# Altium PCB PCB_test_2026-06-06.pcbdoc
Units mm, origin at the board's own origin, x right, y up, seen from the top; angles counter-clockwise.
Board outline 102.65 x 77.65 mm, 2 copper layers (Top Layer, Bottom Layer); 1 components, 36 nets, 36 pads, 0 vias.
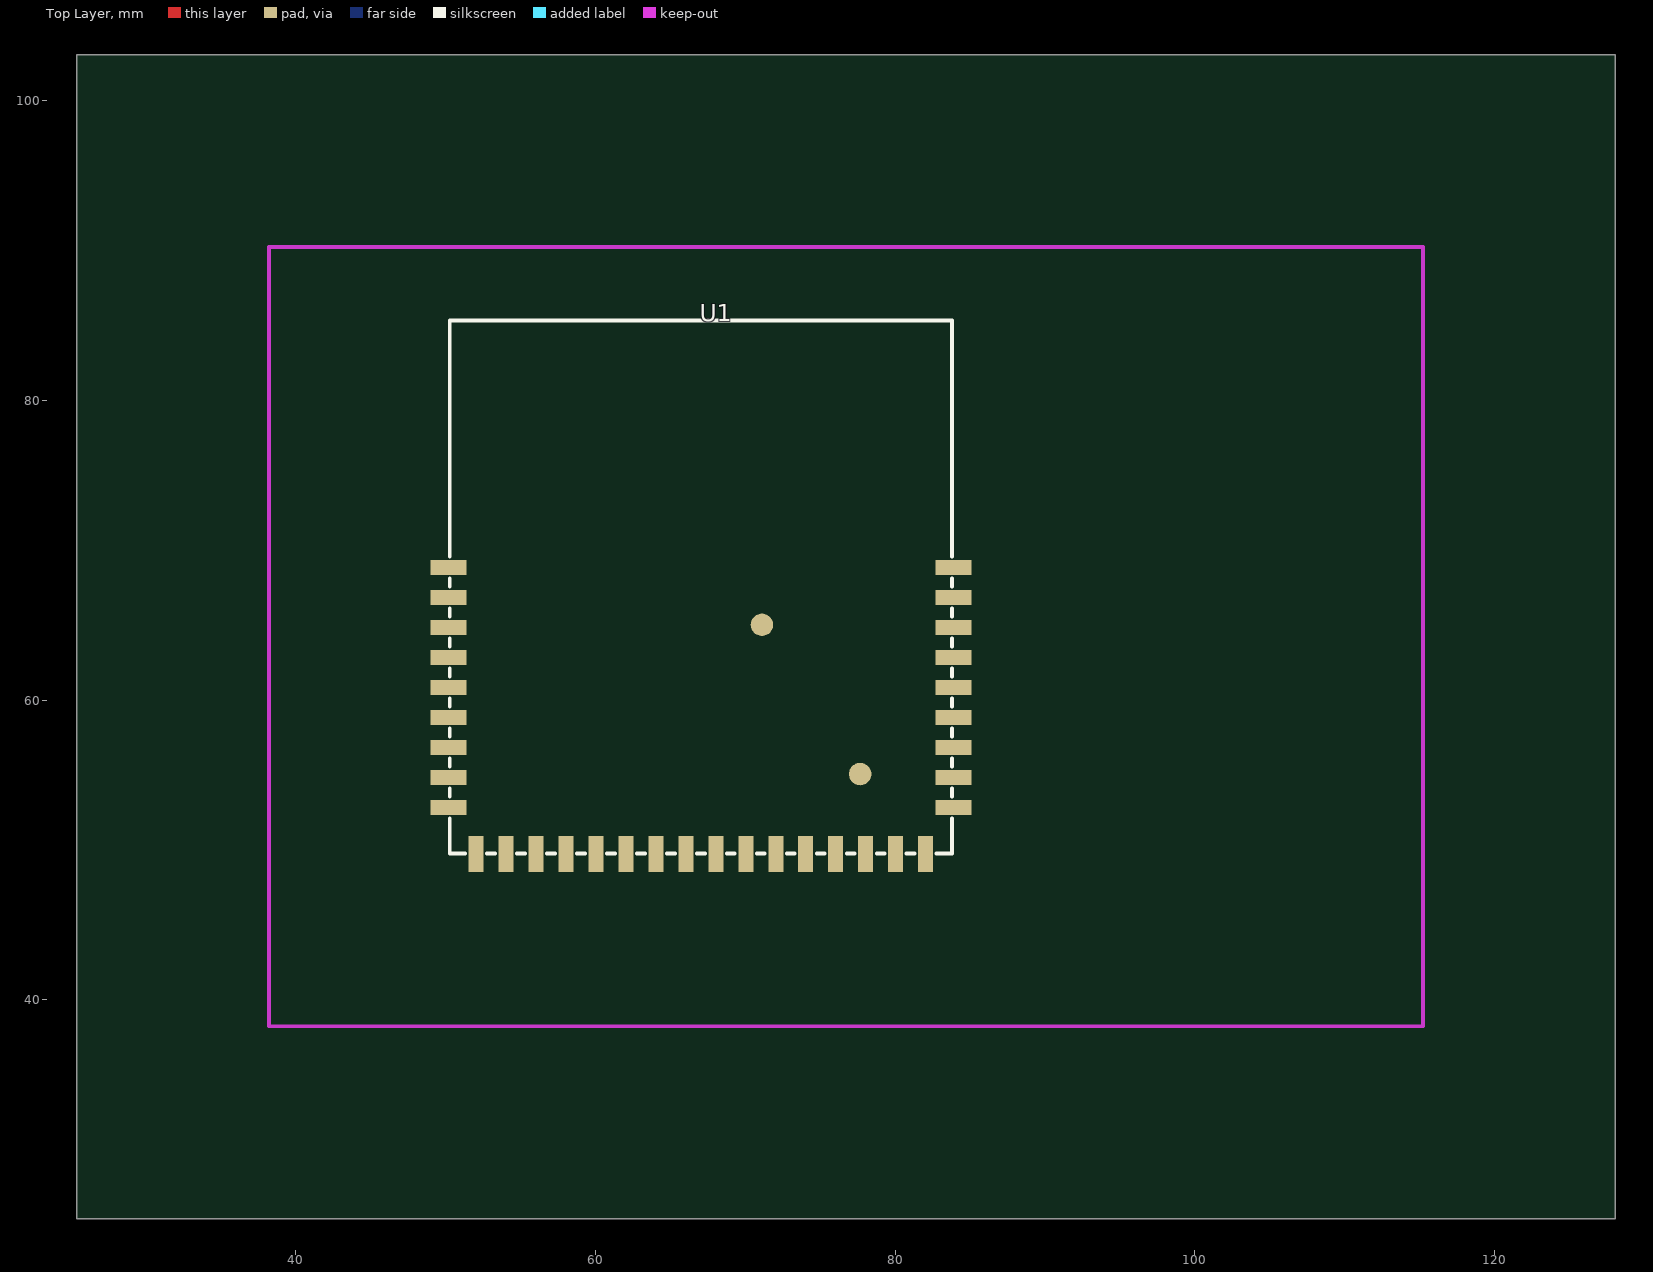
[diagram p0: Top Layer view]
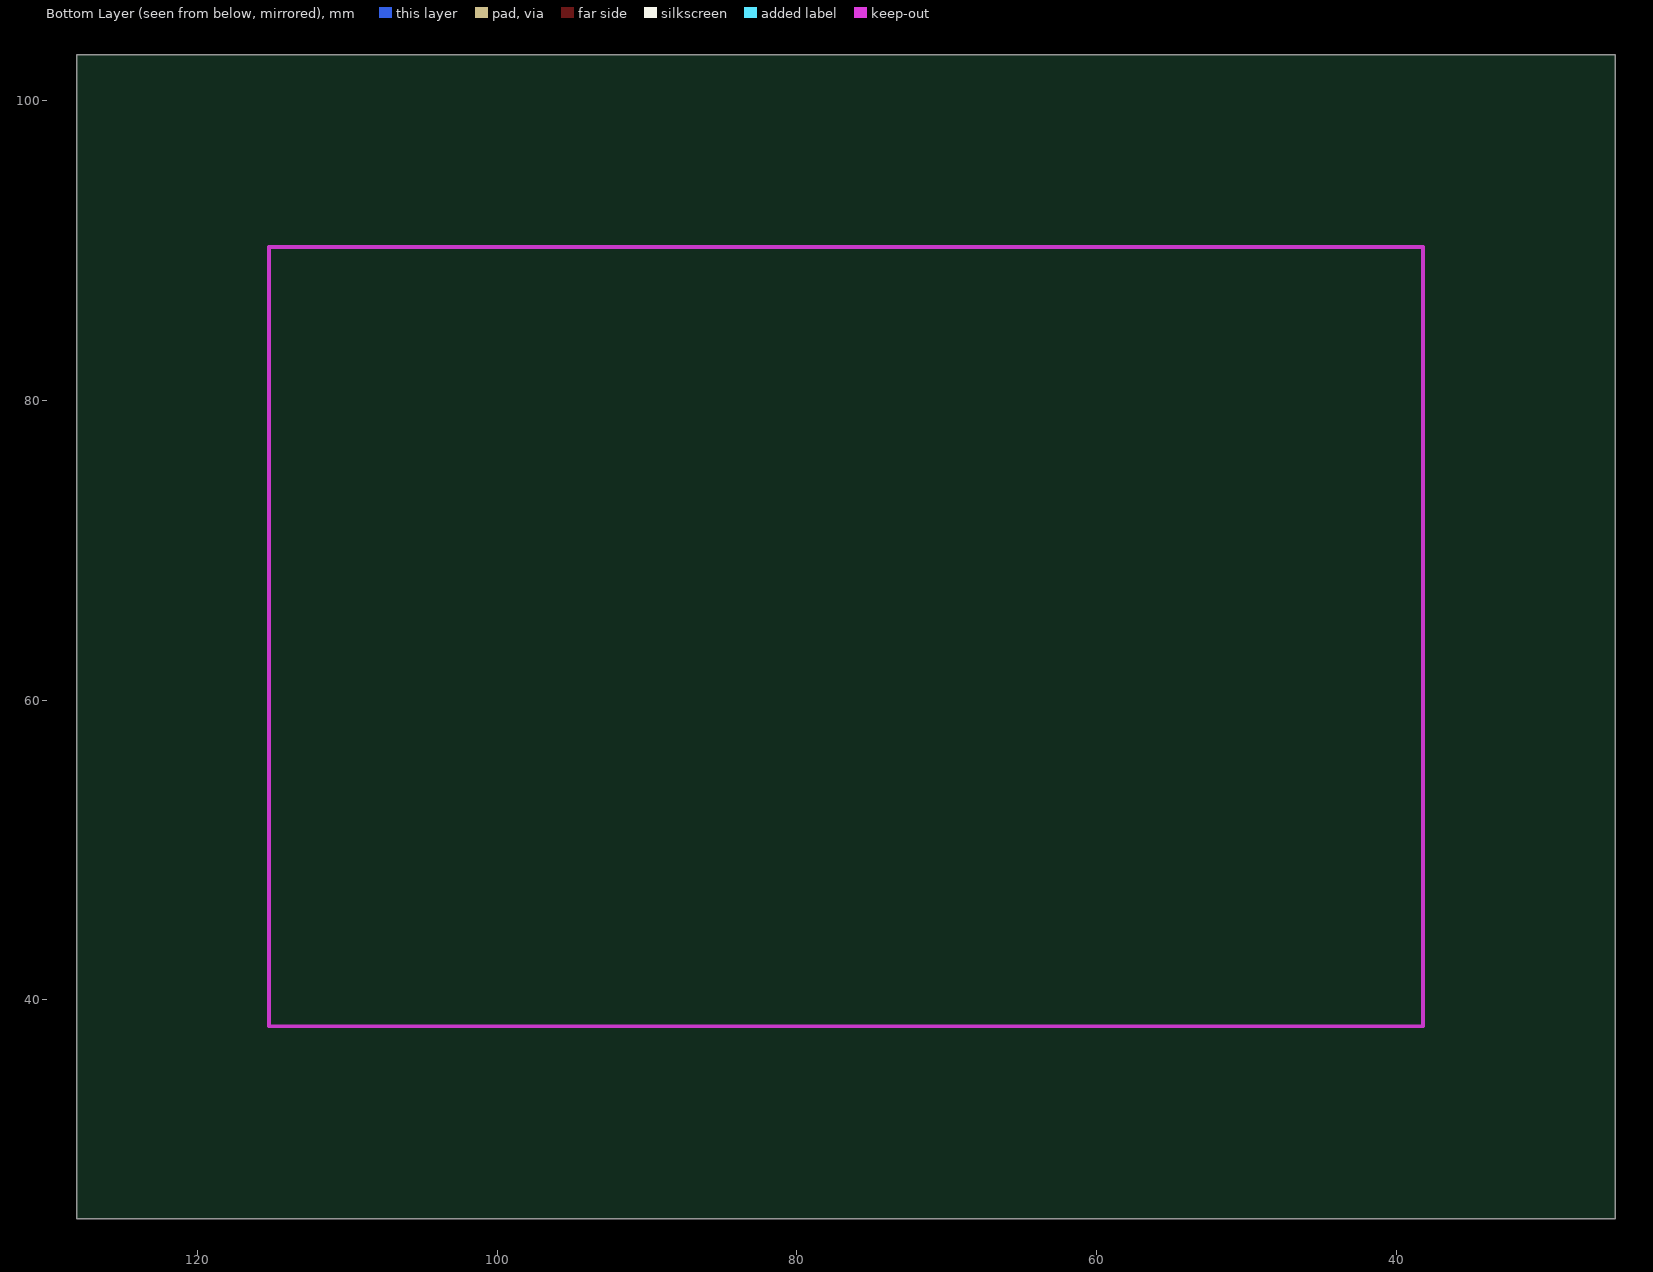
[diagram p1: Bottom Layer view, seen from below]

## Layer stack, top to bottom
Top Layer: signal copper (thickness not stored)
Dielectric: dielectric 0.32, FR-4, Dk 4.8
Bottom Layer: signal copper (thickness not stored)

## Board outline
128.054,25.4 25.4,25.4 25.4,103.054 128.054,103.054

## Components (designator, comment, footprint, x,y, rotation, side; value= is the part's Value field where it differs from the comment)
U1 "BU04" WIRELM-SMD_BU04 67.041,59.278 r0 top

## Footprints (in the part's own frame and the unit in brackets; to place one, negate y for a bottom-side part, rotate by r counter-clockwise, add the part's x,y. Pads: shape width x height; smd on the part's side, far side on the other; paste and mask are expansions set on the pad)
WIRELM-SMD_BU04 [mm]
  rect 2.4x1 smd paste+0 mask+0.051: 1(-16.85,9.55) 2(-16.85,7.55) 3(-16.85,5.55) 4(-16.85,3.55) 5(-16.85,1.55) 6(-16.85,-0.45) 7(-16.85,-2.45) 8(-16.85,-4.45) 9(-16.85,-6.45) 26(16.85,-6.45) 27(16.85,-4.45) 28(16.85,-2.45) 29(16.85,-0.45) 30(16.85,1.55) 31(16.85,3.55) 32(16.85,5.55) 33(16.85,7.55) 34(16.85,9.55)
  rect 1x2.4 smd paste+0 mask+0.051: 10(-15,-9.55) 11(-13,-9.55) 12(-11,-9.55) 13(-9,-9.55) 14(-7,-9.55) 15(-5,-9.55) 16(-3,-9.55) 17(-1,-9.55) 18(1,-9.55) 19(3,-9.55) 20(5,-9.55) 21(7,-9.55) 22(9,-9.55) 23(11,-9.55) 24(13,-9.55) 25(15,-9.55)
  round 1.5 smd paste+0 mask+0.051: 35(4.08,5.74) 36(10.63,-4.22)
  silkscreen extent -16.75,-9.52 16.76,26.05

## Nets (pads, with @x,y where several pads share a name; then routed paths per layer and width w, separated by ;. In a path a pad name is that pad's centre, name@x,y a point inside that pad or via, vN(x,y) a via of type N, cw(c..) or ccw(c..) an arc to the next point about the centre after c; other vN are vias at no path point)
U1_1: U1.1
U1_2: U1.2
U1_3: U1.3
U1_4: U1.4
U1_5: U1.5
U1_6: U1.6
U1_7: U1.7
U1_8: U1.8
U1_9: U1.9
U1_10: U1.10
U1_11: U1.11
U1_12: U1.12
U1_13: U1.13
U1_14: U1.14
U1_15: U1.15
U1_16: U1.16
U1_17: U1.17
U1_18: U1.18
U1_19: U1.19
U1_20: U1.20
U1_21: U1.21
U1_22: U1.22
U1_23: U1.23
U1_24: U1.24
U1_25: U1.25
U1_26: U1.26
U1_27: U1.27
U1_28: U1.28
U1_29: U1.29
U1_30: U1.30
U1_31: U1.31
U1_32: U1.32
U1_33: U1.33
U1_34: U1.34
U1_35: U1.35
U1_36: U1.36